# Altium PCB Controller_Board.PcbDoc (part 2 of 2)
Units mm, origin at the board's own origin, x right, y up, seen from the top; angles counter-clockwise.
Board outline 35 x 30 mm, 4 copper layers (Top Layer, L2 (GND), L3 (PWR), Bottom Layer), stack 1.503 mm thick; 48 components, 52 nets, 230 pads, 106 vias.
Unrouted connection lines stored in the file: 17.
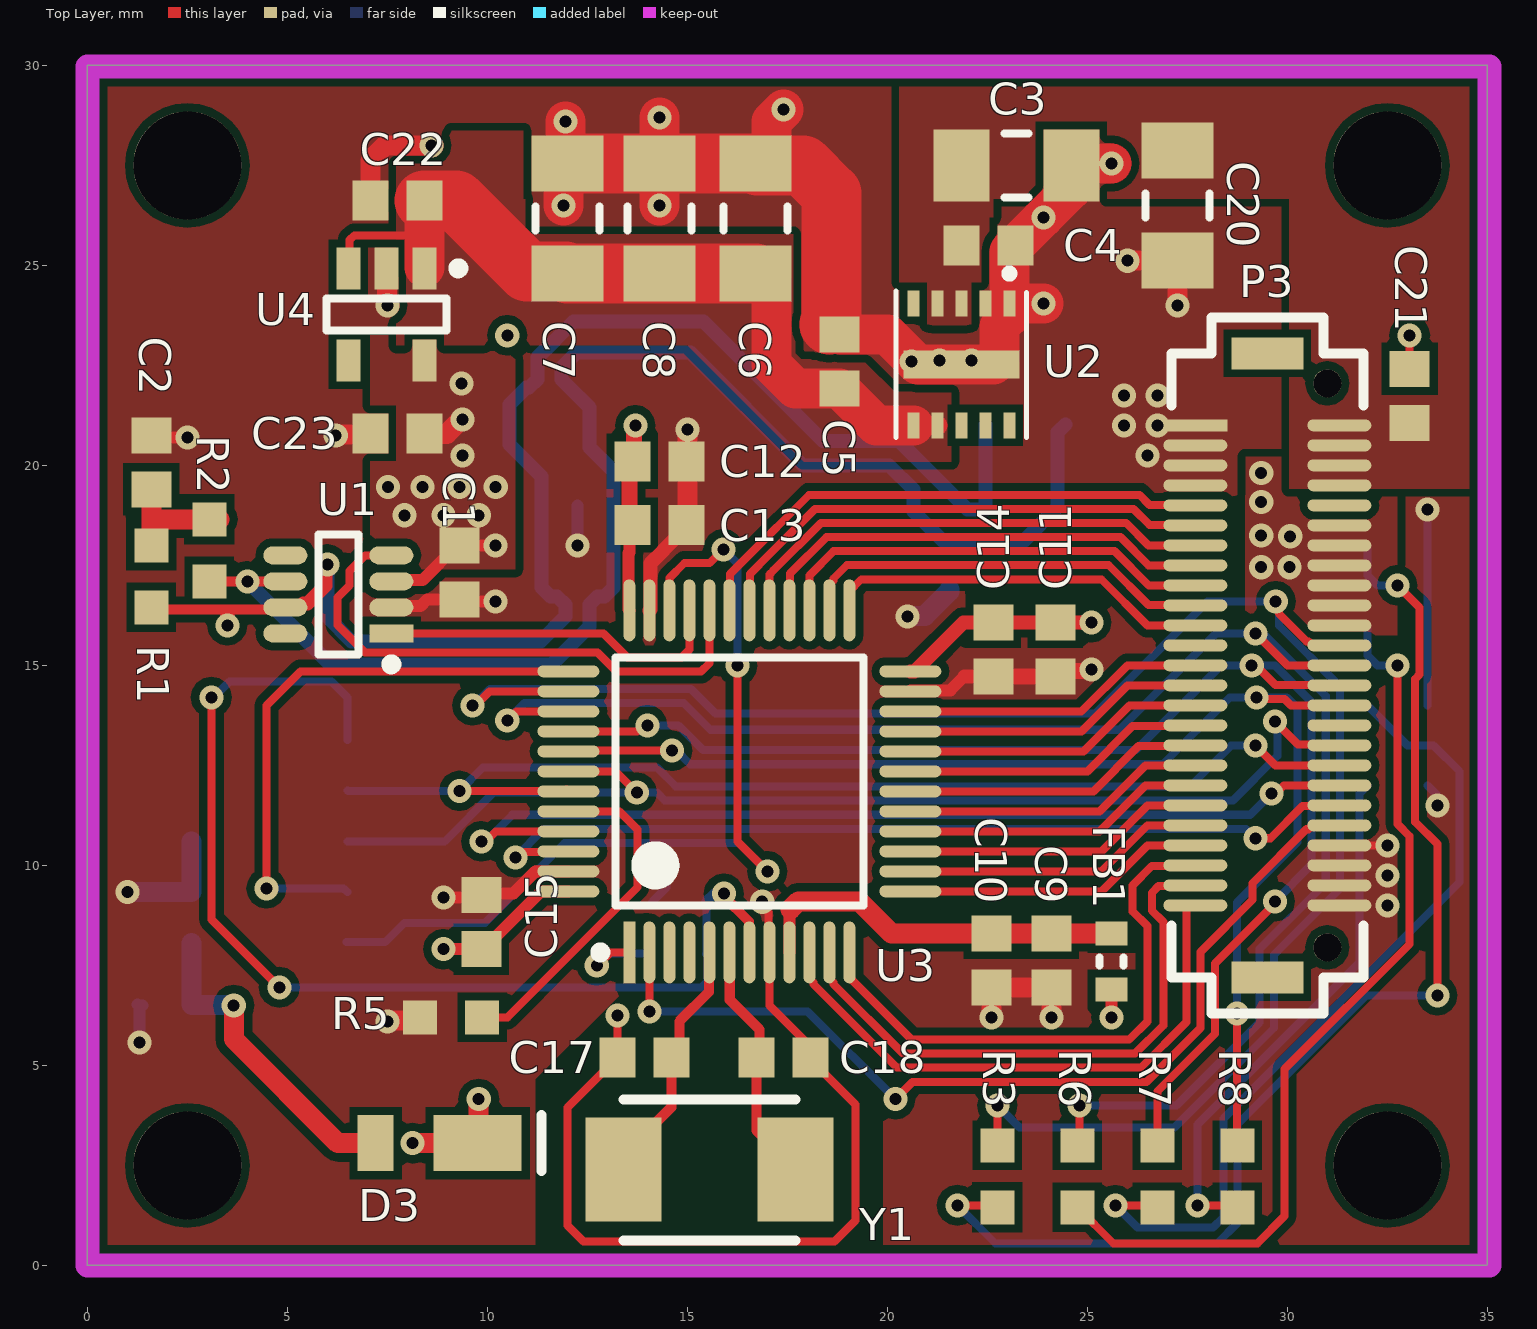
[diagram p0: Top Layer view]

## Polygon pours and split planes (outlines as drawn) (continued)
3V3 on Top Layer "3V3_L01_P191" (solid, pour order 191): 7.075,23.25 7.075,17.4 10.7,17.4 10.7,23.25
NetC5_1 on Top Layer "NETC5_1_L01_P185" (solid, remove dead copper, pour order 185): 7.725,28.365 10.945,28.365 10.945,25.848 11.017,25.776 17.7,25.776 17.7,22.8 17.849,22.651 19.366,22.651 20.182,21.835 21.6,21.835 21.6,20.091 17.909,20.091 15,23 7.725,23
GND on Top Layer "GND_L01_P183" (solid, pour order 183): 29.2,11.035 33.5,11.035 33.5,8 29.196,8
3V3 on Top Layer "Top Layer-3V3" (solid, pour order 181): 28.943,20.211 32.75,20.211 32.75,15.75 28.993,15.75 28.943,15.8
GND on Top Layer "GND_L01_P179" (solid, pour order 179): 25.237,22 28.75,22 28.75,18.75 25.287,18.75
VBAT on Top Layer "Top Layer-VBAT" (solid, pour order 178): 30.052,19.415 35.052,19.415 35.052,30.085 35.104,30.137 20.302,30.137 20.302,23.5 22.652,23.5 22.652,26.665 30.052,26.665
3V3 on L3 (PWR) "3V3_L03_P187" (solid, remove dead copper, pour order 187): -2.5,32.5 -2.5,-2.5 37.5,-2.5 37.5,32.5
GND on L2 (GND) "GND_L02_P189" (solid, remove dead copper, pour order 189): -2.5,32.5 -2.5,-2.5 37.5,-2.5 37.5,32.5
GND on Bottom Layer "GND_L04_P195" (solid, remove dead copper, pour order 195): -2.5,32.5 -2.5,-2.5 37.5,-2.5 37.5,32.5

## Keep-outs
Keep-Out Layer:
  lines w0.6: 0,0 35.052,0 35.052,29.972 0,29.972 0,0

## Other copper
Top Layer:
  pour cut-out: 17.55,8.6 17.55,6.884 19.9,4.534 19.9,0 11.2,0 11.2,4.65 13.669,7.119 13.669,8.581

## Silkscreen, mask and mechanical layers (free items; w line width, h text height)
Bottom Overlay:
  text "CAN H" at 3.8,24.306 h0.8 r90
  text "CAN L" at 5.2,24.306 h0.8 r90
  text "CAN H" at 30.5,24.306 h0.8 r90
  text "CAN L" at 31.9,24.306 h0.8 r90
  text "NC" at 3.7,19.05 h0.8
  text "NC" at 3.7,17.75 h0.8
  text "GND" at 3.7,16.55 h0.8
  text "GND" at 3.7,15.3 h0.8
  text "3V3" at 3.7,14.05 h0.8
  text "nRST" at 13.033,12.7 h0.8
  text "PB7 RX" at 13.033,11.425 h0.8
  text "PB6 TX" at 13.033,10.15 h0.8
  text "SWCLK" at 13.033,8.875 h0.8
  text "SWDIO" at 13.033,7.6 h0.8
  text "CONTROLLER BOARD / REV 7" at 29.1,0.625 h0.8
Bottom Solder:
  drawing of 19 lines, arcs and shapes, not listed
Mechanical 15:
  lines w0.254: 17.5,28.3 17.5,29.5